# Altium PCB LASERDIODE_FIX.PcbDoc (part 4 of 4)
Units mm, origin at the board's own origin, x right, y up, seen from the top; angles counter-clockwise.
Board outline 85 x 85 mm, 4 copper layers (Top Layer, Mid-Layer 1, Mid-Layer 2, Bottom Layer); 546 components, 363 nets, 1494 pads, 1079 vias.
Unrouted connection lines stored in the file: 1020.
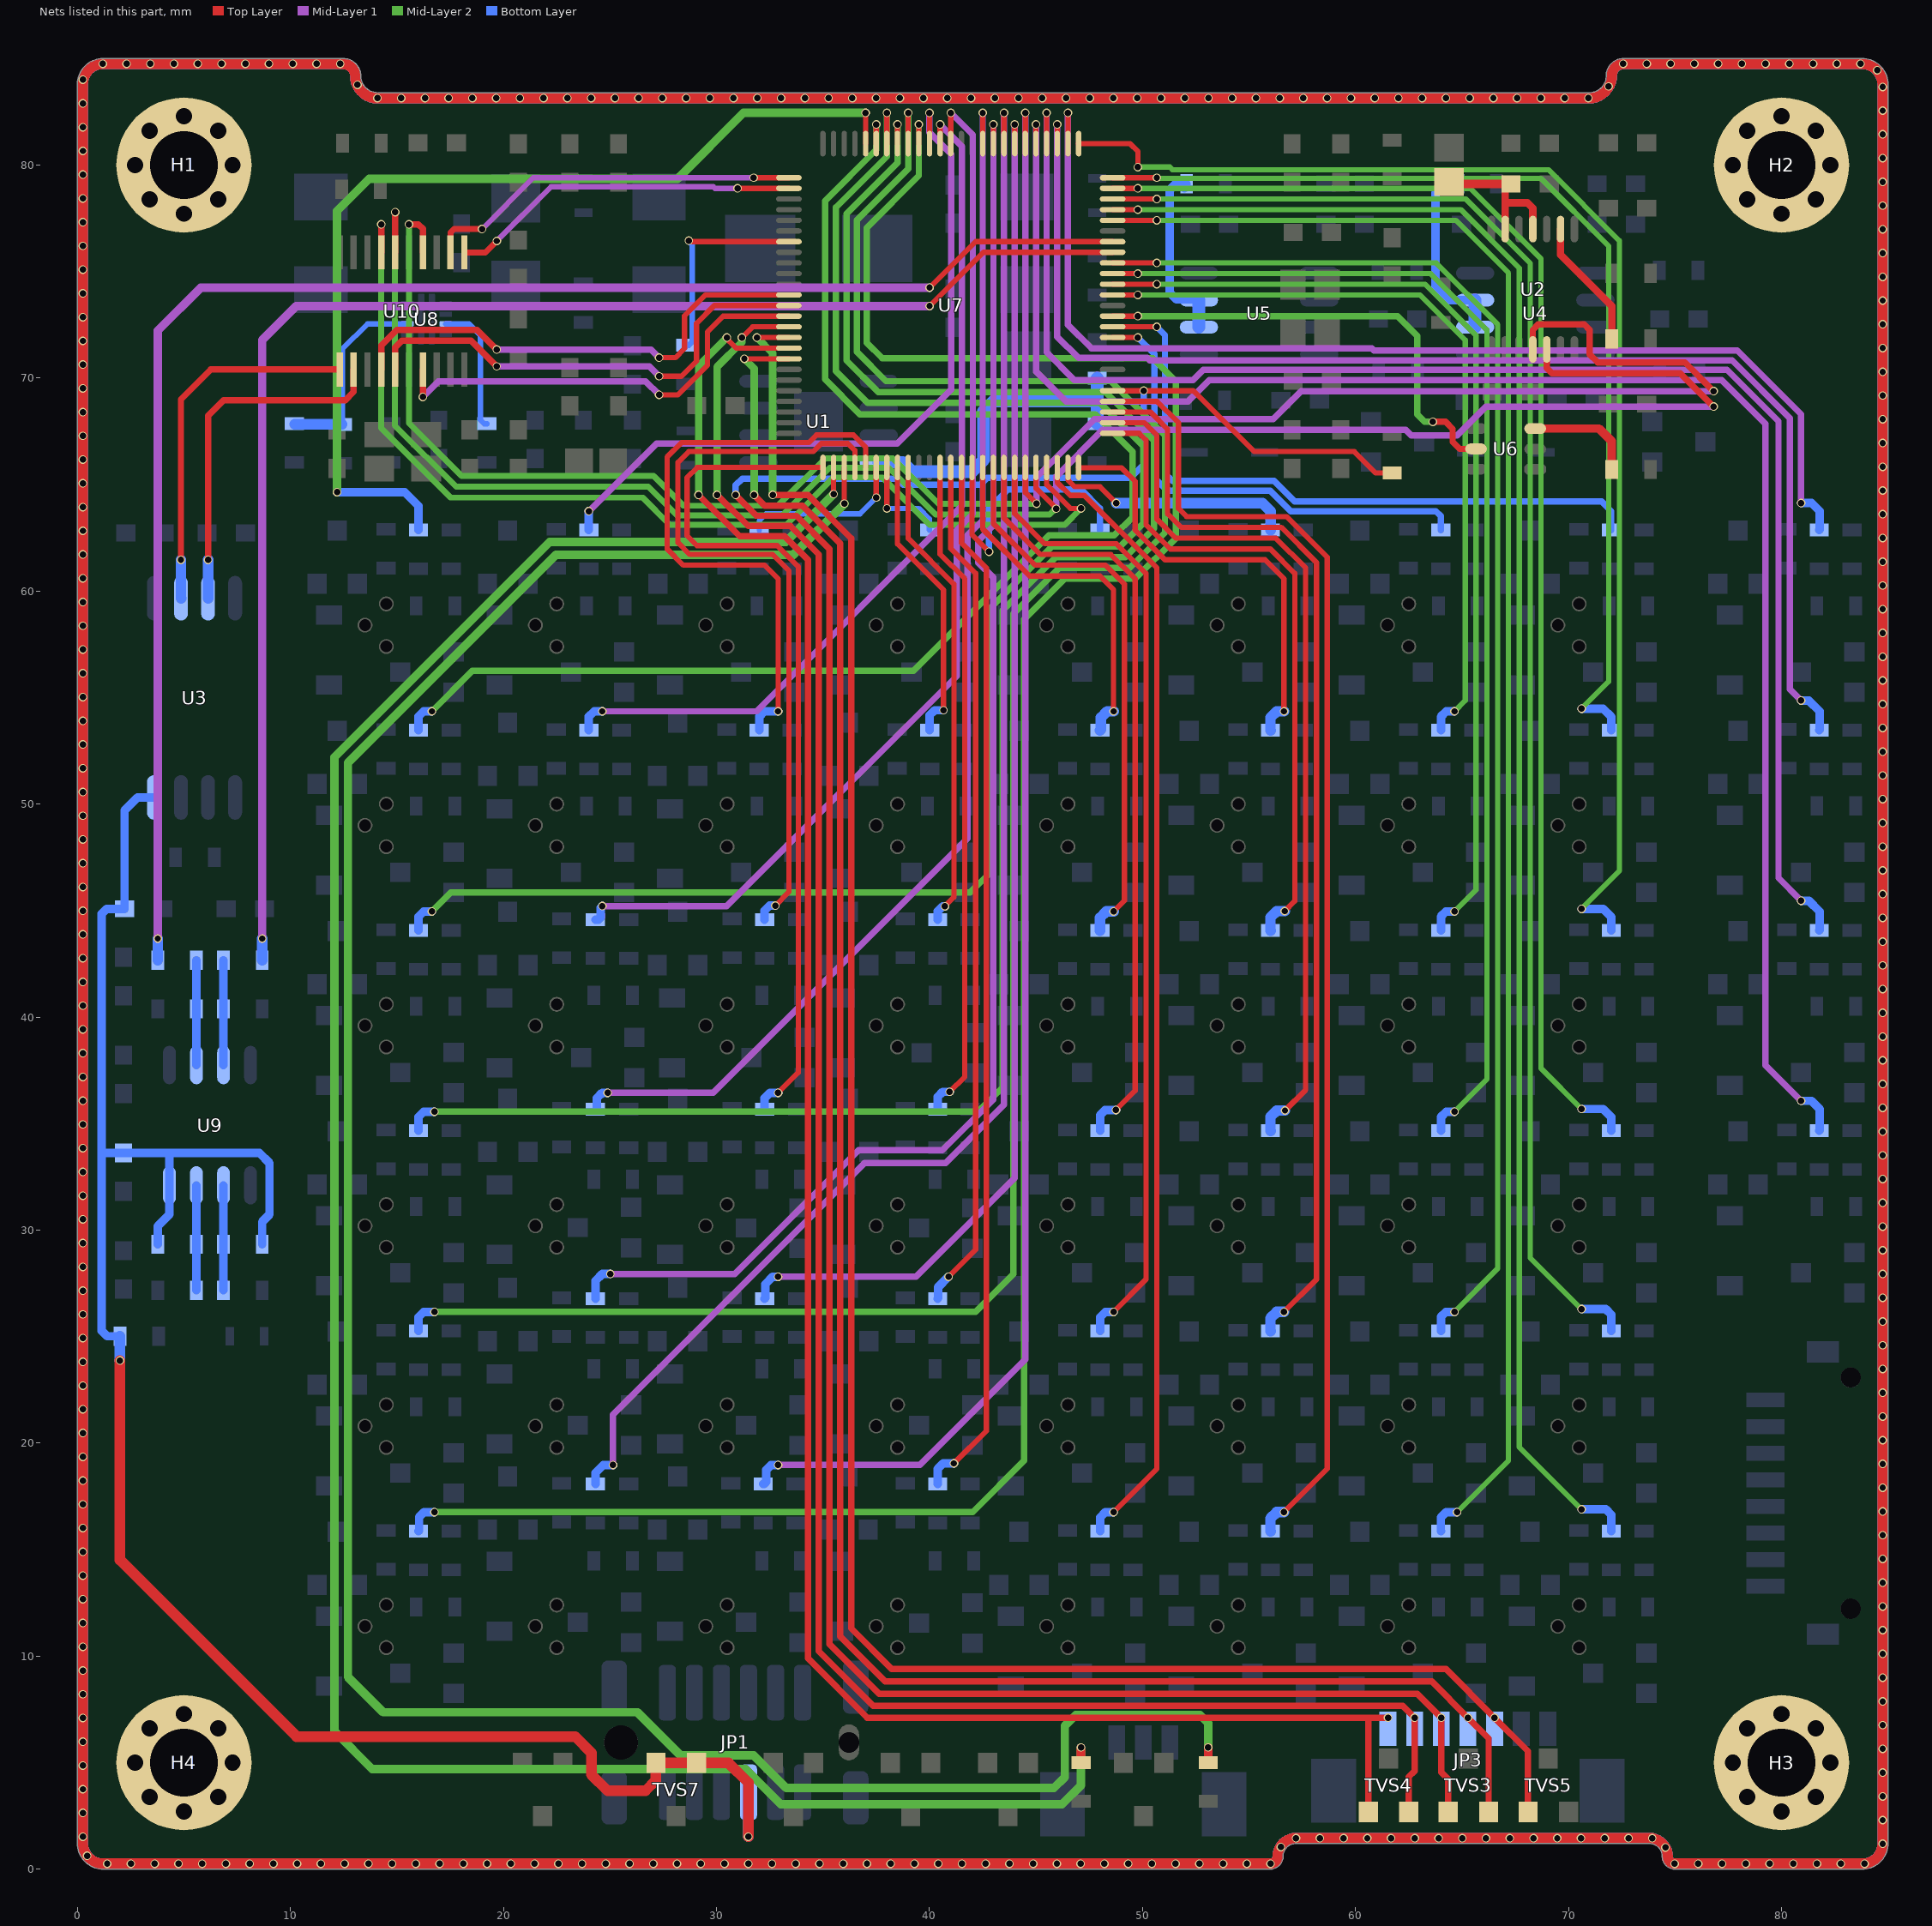
[diagram p6: the nets of this part, all layers, seen from the top]

## Via types
v1: diameter 0.4, hole 0.3, Top Layer to Bottom Layer, tented both sides, 1079 vias

## Nets (pads, with @x,y where several pads share a name; then routed paths per layer and width w, separated by ;. In a path a pad name is that pad's centre, name@x,y a point inside that pad or via, vN(x,y) a via of type N, cw(c..) or ccw(c..) an arc to the next point about the centre after c; other vN are vias at no path point) (continued)
NetR2_1: R2.1 R3.2 U8.2 | length 9.4
  Bottom Layer w0.25: R3.2@10.185,67.856 R3.2@10.204,67.837 ; R2.1@12.426,67.837 R2.1@12.445,67.818 12.445,71.373 13.618,72.546 U8.2@15.487,72.546
  Bottom Layer w0.5: R3.2@10.204,67.837 R2.1@12.426,67.837
NetR4_2: R4.2 U8.9 | length 6.2
  Bottom Layer w0.25: U8.9@17.287,72.546 18.386,72.546 18.923,72.009 18.923,68.031 19.098,67.856 R4.2@19.227,67.856
NetR5_1: R5.1 R7.2 U1.4 | length 15.3
  Bottom Layer w0.6: U1.4@37.623,66.04 38.735,66.04 39.166,65.609 41.987,65.609 42.545,66.167 42.545,68.453 43.016,68.924 47.874,68.924 ; R7.2@47.874,67.856 47.874,68.924 ; R5.1@47.874,69.992 47.874,68.924
NetR185_2: R185.2 U2.9 | length 6.1
  Top Layer w0.35: U2.9@69.626,76.993 69.626,75.789 72.035,73.38 R185.2@72.035,71.844
NetR282_2: R282.2 R287.1 U9.7 | length 4.9
  Bottom Layer w0.4: R287.1@5.588,27.178 R282.2@5.588,29.337 U9.7@5.588,32.1
NetR283_2: R283.2 R289.1 U9.6 | length 4.9
  Bottom Layer w0.4: R289.1@6.858,27.178 R283.2@6.858,29.337 U9.6@6.858,32.1
NetR284_2: R284.2 R290.2 U9.3 | length 4.9
  Bottom Layer w0.4: U9.3@6.858,37.75 R284.2@6.858,40.386 R290.2@6.858,42.672
NetR285_2: R285.2 R286.2 U9.2 | length 4.9
  Bottom Layer w0.4: U9.2@5.588,37.75 R285.2@5.588,40.386 R286.2@5.588,42.672
NetR304_1: R304.1 U5.6 U5.7 | length 8.8
  Bottom Layer w0.4: R304.1@51.97,78.908 51.97,79.021 R304.1@52.07,79.121 51.562,79.121 51.285,78.844 51.285,74.008 51.604,73.688 52.621,73.688 U5.7@52.649,73.66
  Bottom Layer w0.6: U5.6@52.649,72.39 U5.7@52.649,73.66
NetR305_1: R305.1 U4.6 U4.7 | length 9
  Bottom Layer w0.4: R305.1@64.798,79.121 64.742,79.121 64.698,79.076 64.132,79.076 63.754,78.698 63.754,74.295 64.389,73.66 U4.7@65.615,73.66
  Bottom Layer w0.6: U4.6@65.615,72.39 U4.7@65.615,73.66
NetR313_2: R313.2 U7.82 | length 9.9
  Top Layer w0.25: v1(28.702,76.454) 28.743,76.454 28.791,76.406 U7.82@33.4,76.406
  Bottom Layer w0.26: R313.2@28.551,71.539 28.694,71.539 28.864,71.709 28.864,76.254 28.702,76.416 v1(28.702,76.454)
NetR322_2: R322.2 U6.3 | length 5.2
  Top Layer w0.4: U6.3@68.438,67.63 71.435,67.63 72.035,67.03 R322.2@72.035,65.711
NetU3_2: U3.2 U10.1 | length 17.4
  Top Layer w0.3: v1(4.86,61.468) 4.86,68.995 6.267,70.402 U10.1@12.315,70.402
  Bottom Layer w0.5: v1(4.86,61.468) 4.86,59.669 U3.2@4.863,59.666
NetU3_3: U3.3 U10.2 | length 16.9
  Top Layer w0.3: v1(6.133,61.468) 6.133,68.236 6.858,68.961 12.573,68.961 12.965,69.353 U10.2@12.965,70.402
  Bottom Layer w0.5: U3.3@6.133,59.666 v1(6.133,61.468)
RST: JP3.5 R319.2 TVS3.1 U7.30 | length 130
  Top Layer w0.25: U7.30@48.6,69.406 52.387,69.406 55.245,66.548 59.944,66.548 60.946,65.546 R319.2@61.722,65.546
  Top Layer w0.3: v1(30.899,64.516) 31.881,63.534 33.748,63.534 35.306,61.976 35.306,10.561 37.633,8.235 62.905,8.235 v1(64.028,7.112) 64.028,4.552 64.352,4.228 TVS3.1@64.352,2.687
  Bottom Layer w0.3: v1(30.899,64.516) 30.899,64.967 31.21,65.278 38.481,65.278 38.771,64.988 42.382,64.988 42.712,65.318 49.443,65.318 50.06,65.935 v1(50.06,69.404)
RX0BF: U7.76 U10.12 | length 17.9
  Top Layer w0.25: v1(31.75,79.406) U7.76@33.4,79.406
  Top Layer w0.28: U10.12@17.515,75.902 17.525,75.912 17.525,76.832 17.689,76.996 v1(18.991,76.996)
  Mid-Layer 1 w0.25: v1(18.991,76.996) 21.401,79.406 v1(31.75,79.406)
RX1BF: U7.77 U10.11 | length 16.5
  Top Layer w0.25: v1(30.988,78.906) U7.77@33.4,78.906
  Top Layer w0.28: U10.11@18.165,75.902 19.155,75.902 v1(19.689,76.436)
  Mid-Layer 1 w0.25: v1(19.689,76.436) 22.234,78.981 29.858,78.981 29.933,78.906 v1(30.988,78.906)
RXD0: R308.1 U7.2 | length 114.9
  Top Layer w0.25: v1@35.496,64.55 35.5,64.554 U7.2@35.5,65.806
  Top Layer w0.4: R308.1@47.117,5.007 v1(47.117,5.715)
  Mid-Layer 2 w0.4: v1@35.496,64.55 33.253,62.307 22.175,62.307 12.065,52.197 12.065,6.477 13.843,4.699 31.369,4.699 33.02,3.048 46.228,3.048 47.117,3.937 v1(47.117,5.715)
  other v1: 35.5,64.55
SCL: R290.1 U7.43 | length 70.7
  Top Layer w0.25: v1@40.034,73.403 42.536,75.906 U7.43@48.6,75.906
  Mid-Layer 1 w0.4: v1(8.674,43.688) 8.674,71.793 10.263,73.382 v1(40.005,73.382)
  Bottom Layer w0.5: R290.1@8.674,42.672 v1(8.674,43.688)
SDA: R286.1 U7.44 | length 76.1
  Top Layer w0.25: v1(40.005,74.247) 42.164,76.406 U7.44@48.6,76.406
  Mid-Layer 1 w0.4: v1(3.772,43.688) 3.772,72.225 5.794,74.247 v1(40.005,74.247)
  Bottom Layer w0.5: R286.1@3.772,42.672 v1(3.772,43.688)
SHIELD: H1.1 H2.1 H3.1 H4.1 | length 1360.6
  Top Layer w0.5: H1.1@5,80 H1.1@5,82.286 ; 5,84.749 4.997,84.752 ; 4.997,84.752 4.997,84.755 v1(1.192,84.755) ccw(c1.192,83.814) 0.251,83.814 0.251,1.203 ccw(c1.201,1.203) 1.201,0.254 v1(56.014,0.254) ccw(c56.014,0.595) 56.355,0.595 cw(c57.211,0.595) v1(57.211,1.45) 73.794,1.45 cw(c73.794,0.598) 74.647,0.598 74.647,0.584 ccw(c74.979,0.584) v1(74.979,0.252) 83.814,0.252 ccw(c83.814,1.188) v1(84.75,1.188) 84.75,83.794 ccw(c83.792,83.794) 83.792,84.752 v1(72.564,84.752) ccw(c72.564,84.215) 72.026,84.215 cw(c70.955,84.215) 70.955,83.144 v1(14.084,83.144) cw(c14.084,84.177) 13.051,84.177 ccw(c12.476,84.177) 12.476,84.752 4.997,84.752
  Mid-Layer 1 w0.5: 5,84.749 4.997,84.752 ; 4.997,84.752 12.476,84.752 cw(c12.476,84.177) 13.051,84.177 ccw(c14.084,84.177) v1(14.084,83.144) 70.955,83.144 ccw(c70.955,84.215) 72.026,84.215 cw(c72.564,84.215) v1(72.564,84.752) 83.792,84.752 cw(c83.792,83.794) 84.75,83.794 v1(84.75,1.188) cw(c83.814,1.188) 83.814,0.252 v1(74.979,0.252) cw(c74.979,0.584) 74.647,0.584 74.647,0.598 ccw(c73.794,0.598) 73.794,1.45 v1(57.211,1.45) ccw(c57.211,0.595) 56.355,0.595 cw(c56.014,0.595) v1(56.014,0.254) 1.201,0.254 cw(c1.201,1.203) 0.251,1.203 0.251,83.814 cw(c1.192,83.814) v1(1.192,84.755) 4.997,84.755 4.997,84.752
  Mid-Layer 2 w0.5: 5,84.749 4.997,84.752 ; 4.997,84.752 12.476,84.752 cw(c12.476,84.177) 13.051,84.177 ccw(c14.084,84.177) v1(14.084,83.144) 70.955,83.144 ccw(c70.955,84.215) 72.026,84.215 cw(c72.564,84.215) v1(72.564,84.752) 83.792,84.752 cw(c83.792,83.794) 84.75,83.794 v1(84.75,1.188) cw(c83.814,1.188) 83.814,0.252 v1(74.979,0.252) cw(c74.979,0.584) 74.647,0.584 74.647,0.598 ccw(c73.794,0.598) 73.794,1.45 v1(57.211,1.45) ccw(c57.211,0.595) 56.355,0.595 cw(c56.014,0.595) v1(56.014,0.254) 1.201,0.254 cw(c1.201,1.203) 0.251,1.203 0.251,83.814 cw(c1.192,83.814) v1(1.192,84.755) 4.997,84.755 4.997,84.752
  Bottom Layer w0.5: 5,84.749 4.997,84.752 ; 4.997,84.752 4.997,84.755 v1(1.192,84.755) ccw(c1.192,83.814) 0.251,83.814 0.251,1.203 ccw(c1.201,1.203) 1.201,0.254 v1(56.014,0.254) ccw(c56.014,0.595) 56.355,0.595 cw(c57.211,0.595) v1(57.211,1.45) 73.794,1.45 cw(c73.794,0.598) 74.647,0.598 74.647,0.584 ccw(c74.979,0.584) v1(74.979,0.252) 83.814,0.252 ccw(c83.814,1.188) v1(84.75,1.188) 84.75,83.794 ccw(c83.792,83.794) 83.792,84.752 v1(72.564,84.752) ccw(c72.564,84.215) 72.026,84.215 cw(c70.955,84.215) 70.955,83.144 v1(14.084,83.144) cw(c14.084,84.177) 13.051,84.177 ccw(c12.476,84.177) 12.476,84.752 4.997,84.752
  other v1: 1.397,0.254 2.512,0.254 3.626,0.254 4.741,0.254 5.856,0.254 6.97,0.254 8.085,0.254 9.199,0.254 10.314,0.254 11.429,0.254 12.543,0.254 13.658,0.254 14.773,0.254 15.887,0.254 17.002,0.254 18.117,0.254 19.231,0.254 20.346,0.254 21.46,0.254 22.575,0.254 23.69,0.254 24.804,0.254 25.919,0.254 27.034,0.254 28.148,0.254 29.263,0.254 30.378,0.254 31.492,0.254 32.607,0.254 33.721,0.254 34.836,0.254 35.951,0.254 37.065,0.254 38.18,0.254 39.295,0.254 40.409,0.254 41.524,0.254 42.639,0.254 43.753,0.254 44.868,0.254 45.982,0.254 47.097,0.254 48.212,0.254 49.326,0.254 50.441,0.254 51.556,0.254 52.67,0.254 53.785,0.254 54.9,0.254 76.094,0.252 77.208,0.252 78.323,0.252 79.438,0.252 80.552,0.252 81.667,0.252 82.781,0.252 83.896,0.252 0.458,0.628 74.549,1.016 56.491,1.043 58.325,1.45 59.44,1.45 60.555,1.45 61.669,1.45 62.784,1.45 63.898,1.45 65.013,1.45 66.128,1.45 67.242,1.45 68.357,1.45 69.472,1.45 70.586,1.45 71.701,1.45 72.816,1.45 73.93,1.45 0.254,1.524 84.75,2.303 0.254,2.639 84.75,3.418 0.254,3.753 84.75,4.532 0.254,4.868 84.75,5.647 0.254,5.983 84.75,6.762 0.254,7.097 84.75,7.876 0.254,8.212 84.75,8.991 0.254,9.326 84.75,10.105 0.254,10.441 84.75,11.22 0.254,11.556 84.75,12.335 0.254,12.67 84.75,13.449 0.254,13.785 84.75,14.564 0.254,14.9 84.75,15.679 0.254,16.014 84.75,16.793 0.254,17.129 84.75,17.908 0.254,18.244 84.75,19.023 0.254,19.358 84.75,20.137 0.254,20.473 84.75,21.252 0.254,21.587 84.75,22.366 0.254,22.702 84.75,23.481 0.254,23.817 84.75,24.596 0.254,24.931 84.75,25.71 0.254,26.046 84.75,26.825 0.254,27.161 84.75,27.94 0.254,28.275 84.75,29.054 0.254,29.39 84.75,30.169 0.254,30.505 84.75,31.283 0.254,31.619 84.75,32.398 0.254,32.734 84.75,33.513 0.254,33.848 84.75,34.627 0.254,34.963 84.75,35.742 0.254,36.078 84.75,36.857 0.254,37.192 84.75,37.971 0.254,38.307 84.75,39.086 0.254,39.422 84.75,40.201 0.254,40.536 84.75,41.315 0.254,41.651 84.75,42.43 0.254,42.766 84.75,43.544 0.254,43.88 84.75,44.659 0.254,44.995 84.75,45.774 0.254,46.109 84.75,46.888 0.254,47.224 84.75,48.003 0.254,48.339 84.75,49.118 0.254,49.453 84.75,50.232 0.254,50.568 84.75,51.347 0.254,51.683 84.75,52.462 0.254,52.797 84.75,53.576 0.254,53.912 84.75,54.691 0.254,55.027 84.75,55.805 0.254,56.141 84.75,56.92 0.254,57.256 84.75,58.035 0.254,58.37 84.75,59.149 0.254,59.485 84.75,60.264 0.254,60.6 84.75,61.379 0.254,61.714 84.75,62.493 0.254,62.829 84.75,63.608 0.254,63.944 84.75,64.723 0.254,65.058 84.75,65.837 0.254,66.173 84.75,66.952 0.254,67.288 84.75,68.066 0.254,68.402 84.75,69.181 0.254,69.517 84.75,70.296 0.254,70.631 84.75,71.41 0.254,71.746 84.75,72.525 0.254,72.861 84.75,73.64 0.254,73.975 84.75,74.754 0.254,75.09 84.75,75.869 0.254,76.205 84.75,76.984 0.254,77.319 84.75,78.098 0.254,78.434 84.75,79.213 0.254,79.549 84.75,80.327 0.254,80.663 84.75,81.442 0.254,81.778 84.75,82.557 0.254,82.892 15.199,83.144 16.314,83.144 17.428,83.144 18.543,83.144 19.658,83.144 20.772,83.144 21.887,83.144 23.002,83.144 24.116,83.144 25.231,83.144 26.345,83.144 27.46,83.144 28.575,83.144 29.689,83.144 30.804,83.144 31.919,83.144 33.033,83.144 34.148,83.144 35.263,83.144 36.377,83.144 37.492,83.144 38.606,83.144 39.721,83.144 40.836,83.144 41.95,83.144 43.065,83.144 44.18,83.144 45.294,83.144 46.409,83.144 47.524,83.144 48.638,83.144 49.753,83.144 50.867,83.144 51.982,83.144 53.097,83.144 54.211,83.144 55.326,83.144 56.441,83.144 57.555,83.144 58.67,83.144 59.785,83.144 60.899,83.144 62.014,83.144 63.128,83.144 64.243,83.144 65.358,83.144 66.472,83.144 67.587,83.144 68.702,83.144 69.816,83.144 70.931,83.144 84.75,83.671 71.882,83.693 13.151,83.767 0.254,84.007 84.494,84.457 2.307,84.755 3.421,84.755 4.536,84.755 5.65,84.755 6.765,84.755 7.88,84.755 8.994,84.755 10.109,84.755 11.224,84.755 12.338,84.755 73.678,84.752 74.793,84.752 75.908,84.752 77.022,84.752 78.137,84.752 79.251,84.752 80.366,84.752 81.481,84.752 82.595,84.752 83.71,84.752
SPI_MISO: U7.22 U10.17 | length 50.7
  Top Layer w0.25: U7.22@45.5,65.806 45.5,64.99 46.609,63.881 v1(47.117,63.881)
  Top Layer w0.3: U10.17@14.265,75.902 v1(14.265,77.216)
  Mid-Layer 2 w0.28: v1(14.265,77.216) 14.265,67.65 17.526,64.389 26.543,64.389 27.813,63.119 33.286,63.119 35.503,65.336 37.788,65.336 40.005,63.119 46.355,63.119 v1(47.117,63.881)
SPI_MOSI: U2.5 U7.21 U10.16 | length 92.4
  Top Layer w0.25: U7.21@45,65.806 45,64.831 45.947,63.884 v1(45.947,63.866)
  Top Layer w0.3: U10.16@14.915,75.902 v1(14.915,77.793) ; U2.5@68.976,71.343 68.976,70.47 69.215,70.231 75.243,70.231 v1(76.815,68.66)
  Mid-Layer 1 w0.3: v1(45.947,63.866) 45.947,65.379 48.131,67.564 62.357,67.564 62.611,67.31 64.77,67.31 66.12,68.66 v1(76.815,68.66)
  Mid-Layer 2 w0.28: v1@14.91,77.793 14.91,67.767 17.78,64.897 26.797,64.897 28.143,63.551 33.076,63.551 35.311,65.786 38.096,65.786 40.294,63.587 45.641,63.587 45.92,63.866 v1(45.947,63.866)
SPI_SCK: U2.4 U7.20 U10.14 | length 92.2
  Top Layer w0.25: U7.20@44.5,65.806 44.5,64.626 v1(45.025,64.101)
  Top Layer w0.3: v1(15.565,77.216) 16.002,77.216 16.215,77.003 U10.14@16.215,75.902 ; U2.4@68.326,71.343 68.326,72.263 68.58,72.517 70.739,72.517 70.993,72.263 70.993,71.12 71.374,70.739 75.462,70.739 v1(76.815,69.387)
  Mid-Layer 1 w0.3: v1(45.025,64.101) 45.025,65.345 47.752,68.072 56.134,68.072 57.449,69.387 v1(76.815,69.387)
  Mid-Layer 2 w0.28: v1(15.565,77.216) 15.565,67.874 18.034,65.405 27.051,65.405 28.448,64.008 32.887,64.008 35.116,66.238 38.283,66.238 40.42,64.101 v1(45.025,64.101)
SW0: R36.1 U7.36 | length 31.7
  Top Layer w0.25: U7.36@48.6,72.406 v1(50.673,72.406)
  Bottom Layer w0.3: v1(50.673,72.406) 51.054,72.025 51.054,65.525 51.404,65.175 56.179,65.175 57.144,64.21 71.553,64.21 72.009,63.754 R36.1@72.009,62.864
SW1: R37.1 U7.35 | length 22.9
  Top Layer w0.25: U7.35@48.6,71.906 v1(49.784,71.906)
  Bottom Layer w0.3: v1@49.803,71.887 50.56,71.13 50.56,65.313 51.163,64.709 56.001,64.709 56.956,63.754 63.775,63.754 64.009,63.52 R37.1@64.009,62.864
SW2: R38.1 U7.24 | length 11.6
  Top Layer w0.25: U7.24@46.5,65.806 46.5,65.214 46.817,64.898 48.005,64.898 v1(48.768,64.135)
  Bottom Layer w0.5: v1(48.768,64.135) 55.626,64.135 56.009,63.752 R38.1@56.009,62.864
SW3: R39.1 U7.15 | length 13.3
  Top Layer w0.25: U7.15@42,65.806 42,62.648 v1(42.799,61.849)
  Bottom Layer w0.3: v1(42.799,61.849) 42.799,63.881 43.688,64.77 47.117,64.77 48.009,63.878 R39.1@48.009,62.864
SW4: R40.1 U7.7 | length 4.7
  Top Layer w0.25: v1(38,63.881) U7.7@38,65.806
  Bottom Layer w0.25: v1(38,63.881) 39.502,63.881 39.991,63.392 39.991,62.882 R40.1@40.009,62.864
SW5: R41.1 U7.6 | length 7.8
  Top Layer w0.25: v1(37.5,64.389) U7.6@37.5,65.806
  Bottom Layer w0.25: R41.1@32.009,62.864 32.009,63.313 32.324,63.627 36.738,63.627 v1(37.5,64.389)
SW6: R42.1 U7.65 | length 35.1
  Top Layer w0.25: U7.65@40,81.006 v1(40,82.454)
  Mid-Layer 1 w0.3: v1(24.009,63.754) 27.184,66.929 38.481,66.929 41.021,69.469 41.021,73.279 41.021,73.533 41.021,80.518 40,81.539 v1(40,82.454)
  Bottom Layer w0.4: R42.1@24.009,62.864 v1(24.009,63.754)
SW7: R43.1 U7.71 | length 46.6
  Top Layer w0.25: U7.71@37,81.006 v1(37,82.454)
  Mid-Layer 2 w0.4: v1(12.192,64.643) 12.192,77.851 13.699,79.358 28.177,79.358 31.273,82.454 v1(37,82.454)
  Bottom Layer w0.4: v1(12.192,64.643) 15.367,64.643 16.009,64.001 R43.1@16.009,62.864
SW8: R44.1 U7.50 | length 49
  Top Layer w0.25: U7.50@48.6,79.406 v1(50.673,79.406)
  Mid-Layer 2 w0.25: v1@50.673,79.375 68.707,79.375 71.882,76.2 71.882,55.753 v1(70.612,54.483)
  Bottom Layer w0.4: v1(70.612,54.483) 71.628,54.483 72.009,54.102 R44.1@72.009,53.464
SW9: R71.1 U7.39 | length 36.4
  Top Layer w0.25: U7.39@48.6,73.906 v1(49.784,73.906)
  Mid-Layer 2 w0.25: v1(49.784,73.906) 63.028,73.906 65.151,71.783 65.151,54.864 v1(64.643,54.356)
  Bottom Layer w0.4: R71.1@64.009,53.464 64.009,54.103 64.262,54.356 v1(64.643,54.356)
SW10: R70.1 U7.25 | length 20.7
  Top Layer w0.25: U7.25@47,65.806 47,65.786 49.022,65.786 49.657,65.151 49.657,62.865 51.054,61.468 55.753,61.468 56.642,60.579 v1(56.642,54.356)
  Bottom Layer w0.5: R70.1@56.009,53.464 56.007,53.466 56.007,54.063 56.3,54.356 v1(56.642,54.356)
SW11: R69.1 U7.16 | length 17.3
  Top Layer w0.25: U7.16@42.5,65.806 42.5,62.91 44.704,60.706 48.006,60.706 48.641,60.071 v1(48.641,54.356)
  Bottom Layer w0.5: R69.1@48.009,53.464 48.053,53.507 48.053,54.063 48.346,54.356 v1(48.641,54.356)
SW12: R68.1 U7.8 | length 13.7
  Top Layer w0.25: U7.8@38.5,65.806 38.5,62.211 40.658,60.053 v1(40.658,54.405)
  Bottom Layer w0.4: R68.1@40.009,53.464 40.009,54.171 40.243,54.405 v1(40.658,54.405)
SW13: R67.1 U7.5 | length 28.9
  Top Layer w0.25: v1(32.893,54.356) 32.893,60.579 32.258,61.214 28.448,61.214 27.686,61.976 27.686,66.294 28.367,66.975 34.336,66.975 34.692,67.331 36.428,67.331 37,66.759 U7.5@37,65.806
  Bottom Layer w0.4: R67.1@32.009,53.464 32.009,54.107 32.258,54.356 v1(32.893,54.356)
SW14: R66.1 U7.64 | length 41.5
  Top Layer w0.25: U7.64@40.5,81.006 v1(40.5,81.904)
  Mid-Layer 1 w0.3: v1(24.638,54.356) 31.877,54.356 41.529,64.008 41.529,80.875 v1(40.5,81.904)
  Bottom Layer w0.4: R66.1@24.009,53.464 24.009,54.108 24.257,54.356 v1(24.638,54.356)
SW15: R65.1 U7.70 | length 70.8
  Top Layer w0.25: U7.70@37.5,81.006 v1(37.5,81.904)
  Mid-Layer 2 w0.3: v1(16.637,54.356) 18.542,56.261 39.253,56.261 45.603,62.611 48.673,62.611 49.53,63.468 49.53,66.548 47.78,68.298 40.822,68.298 36.739,68.298 35.098,69.94 35.098,78.32 37.5,80.723 v1(37.5,81.904)
  Bottom Layer w0.4: R65.1@16.009,53.464 16.009,54.109 16.256,54.356 v1(16.637,54.356)
SW16: R64.1 U7.51 | length 62
  Top Layer w0.25: U7.51@47,81.006 49.423,81.006 49.784,80.645 v1(49.784,79.906)
  Mid-Layer 2 w0.25: v1(49.784,79.906) 51.285,79.906 51.41,79.781 69.063,79.781 72.39,76.454 72.39,46.863 v1(70.612,45.085)
  Bottom Layer w0.4: v1(70.612,45.085) 71.628,45.085 72.009,44.704 R64.1@72.009,44.064
SW17: R63.1 U7.40 | length 46.9
  Top Layer w0.25: U7.40@48.6,74.406 v1(50.673,74.406)
  Mid-Layer 2 w0.25: v1(50.673,74.406) 63.262,74.406 65.659,72.009 65.659,45.974 v1(64.643,44.958)
  Bottom Layer w0.4: R63.1@64.009,44.064 64.009,44.724 64.243,44.958 v1(64.643,44.958)
SW18: R90.1 U7.26 | length 31.1
  Top Layer w0.25: U7.26@48.6,67.406 49.845,67.406 50.165,67.086 50.165,63.119 51.308,61.976 56.007,61.976 57.15,60.833 57.15,45.451 v1(56.675,44.976)
  Bottom Layer w0.5: R90.1@56.009,44.064 56.007,44.066 56.007,44.683 56.3,44.976 v1(56.675,44.976)
SW19: R91.1 U7.17 | length 26.9
  Top Layer w0.25: U7.17@43,65.806 43,63.172 44.958,61.214 48.26,61.214 49.149,60.325 49.149,45.466 v1(48.641,44.958)
  Bottom Layer w0.5: R91.1@48.009,44.064 48.006,44.067 48.006,44.665 48.299,44.958 v1(48.641,44.958)
SW20: R92.1 U7.9 | length 22.5
  Top Layer w0.25: U7.9@39,65.806 39,62.473 41.148,60.325 41.148,45.627 v1(40.724,45.203)
  Bottom Layer w0.4: R92.1@40.385,44.572 40.386,44.969 40.62,45.203 v1(40.724,45.203)
SW21: R93.1 U7.4 | length 36.1
  Top Layer w0.25: v1(32.76,45.236) 33.401,45.878 33.401,60.96 32.639,61.722 28.751,61.722 28.194,62.279 28.194,66.04 28.702,66.548 34.544,66.548 34.925,66.929 36.171,66.929 36.5,66.6 U7.4@36.5,65.806
  Bottom Layer w0.4: R93.1@32.263,44.572 32.258,44.577 32.258,45.002 32.492,45.236 v1(32.76,45.236)
SW22: R94.1 U7.63 | length 50.6
  Top Layer w0.25: U7.63@41,81.006 v1(41,82.454)
  Mid-Layer 1 w0.3: v1(24.638,45.212) 30.48,45.212 41.275,56.007 41.275,62.55 41.275,62.865 42.037,63.627 42.037,81.417 v1(41,82.454)
  Bottom Layer w0.4: R94.1@24.318,44.572 24.468,44.572 24.568,44.672 24.568,45.142 v1(24.638,45.212)
SW23: R95.1 U7.69 | length 83.7
  Top Layer w0.25: U7.69@38,81.006 v1(38,82.454)
  Mid-Layer 2 w0.3: v1(16.637,44.958) 17.526,45.847 41.91,45.847 42.926,46.863 42.926,59.285 45.745,62.103 48.955,62.103 50.038,63.186 50.038,66.802 48.006,68.834 47.498,68.834 37.096,68.834 35.605,70.325 35.605,78.009 38,80.404 v1(38,82.454)
  Bottom Layer w0.4: R95.1@16.009,44.064 16.009,44.711 16.256,44.958 v1(16.637,44.958)
SW24: R96.1 U7.49 | length 64.4
  Top Layer w0.25: U7.49@48.6,78.906 v1(49.784,78.906)
  Mid-Layer 2 w0.25: v1(49.784,78.906) 65.405,78.906 68.707,75.604 68.707,37.592 v1(70.612,35.687)
  Bottom Layer w0.4: v1(70.612,35.687) 71.628,35.687 72.009,35.306 R96.1@72.009,34.664
SW25: R97.1 U7.41 | length 57.4
  Top Layer w0.25: U7.41@48.6,74.906 v1(49.784,74.906)
  Mid-Layer 2 w0.25: v1(49.784,74.906) 63.524,74.906 66.167,72.263 66.167,37.084 v1(64.643,35.56)
  Bottom Layer w0.4: R97.1@64.009,34.664 64.009,35.307 64.262,35.56 v1(64.643,35.56)
SW26: R98.1 U7.27 | length 41.5
  Top Layer w0.25: U7.27@48.6,67.906 50.077,67.906 50.673,67.31 50.673,63.373 51.562,62.484 56.261,62.484 57.658,61.087 57.658,36.583 v1(56.691,35.616)
  Bottom Layer w0.5: R98.1@56.009,34.664 56.007,34.666 56.007,35.323 56.3,35.616 v1(56.691,35.616)
SW27: R116.1 U7.18 | length 36.6
  Top Layer w0.25: U7.18@43.5,65.806 43.5,63.434 45.212,61.722 48.514,61.722 49.657,60.579 49.657,36.544 v1(48.753,35.64)
  Bottom Layer w0.4: R116.1@48.009,34.664 48.009,35.405 48.243,35.64 v1(48.753,35.64)
SW28: R115.1 U7.12 | length 31.3
  Top Layer w0.25: U7.12@40.5,65.806 40.5,61.735 41.656,60.579 41.656,37.199 v1(40.948,36.491)
  Bottom Layer w0.4: R115.1@40.385,35.68 40.386,36.257 40.62,36.491 v1(40.948,36.491)
SW29: R114.1 U7.1 | length 41.5
  Top Layer w0.25: v1(32.893,36.449) 33.84,37.396 33.84,61.156 32.856,62.14 29.081,62.14 28.623,62.598 28.623,65.327 29.102,65.806 U7.1@35,65.806
  Bottom Layer w0.4: R114.1@32.263,35.68 32.263,36.2 32.512,36.449 v1(32.893,36.449)
SW30: R113.1 U7.60 | length 58.8
  Top Layer w0.25: U7.60@42.5,81.006 v1(42.5,82.454)
  Mid-Layer 1 w0.3: v1(24.892,36.449) 29.845,36.449 41.783,48.387 41.783,62.611 42.5,63.328 v1(42.5,82.454)
  Bottom Layer w0.4: R113.1@24.371,35.669 24.384,35.682 24.384,36.195 24.638,36.449 v1(24.892,36.449)
SW31: R112.1 U7.68 | length 92.8
  Top Layer w0.25: U7.68@38.5,81.006 v1(38.5,81.904)
  Mid-Layer 2 w0.3: v1(16.764,35.56) 42.291,35.56 43.434,36.703 43.434,59.1 45.929,61.595 49.193,61.595 50.546,62.948 50.546,67.056 48.26,69.342 37.592,69.342 36.112,70.822 36.112,77.717 38.5,80.106 v1(38.5,81.904)
  Bottom Layer w0.4: R112.1@16.009,34.664 16.009,35.313 16.256,35.56 v1(16.764,35.56)
SW32: R165.1 U7.48 | length 73.2
  Top Layer w0.25: U7.48@48.6,78.406 v1(50.673,78.406)
  Mid-Layer 2 w0.25: v1(50.673,78.406) 65.185,78.406 68.199,75.392 68.199,28.702 v1(70.612,26.289)
  Bottom Layer w0.4: v1(70.612,26.289) 71.755,26.289 72.009,26.035 R165.1@72.009,25.264
SW33: R166.1 U7.42 | length 67.9
  Top Layer w0.25: U7.42@48.6,75.406 v1(50.673,75.406)
  Mid-Layer 2 w0.25: v1(50.673,75.406) 63.786,75.406 66.675,72.517 66.675,28.194 v1(64.643,26.162)
  Bottom Layer w0.4: R166.1@64.009,25.264 64.009,25.928 64.243,26.162 v1(64.643,26.162)
SW34: R167.1 U7.28 | length 52
  Top Layer w0.25: U7.28@48.6,68.406 50.372,68.406 51.181,67.597 51.181,63.627 51.816,62.992 56.515,62.992 58.166,61.341 58.166,27.686 v1(56.642,26.162)
  Bottom Layer w0.5: R167.1@56.009,25.264 56.007,25.266 56.007,25.869 56.3,26.162 v1(56.642,26.162)
SW35: R168.1 U7.19 | length 46.2
  Top Layer w0.25: U7.19@44,65.806 44,63.638 45.414,62.224 48.774,62.224 50.165,60.833 50.165,27.686 v1(48.641,26.162)
  Bottom Layer w0.4: R168.1@48.009,25.264 48.009,25.911 48.26,26.162 v1(48.641,26.162)
SW36: R169.1 U7.13 | length 40.2
  Top Layer w0.25: v1(40.894,27.813) 42.164,29.083 42.164,60.833 41,61.997 U7.13@41,65.806
  Bottom Layer w0.4: R169.1@40.385,26.788 40.415,26.817 40.415,27.334 v1(40.894,27.813)
SW37: R170.1 U7.57 | length 64.8
  Top Layer w0.25: U7.57@44,81.006 v1(44,81.904)
  Mid-Layer 1 w0.3: v1(32.893,27.813) 39.37,27.813 44,32.443 v1(44,81.904)
  Bottom Layer w0.4: R170.1@32.263,26.788 32.289,26.813 32.289,27.463 32.638,27.813 v1(32.893,27.813)
SW38: R171.1 U7.59 | length 70.2
  Top Layer w0.25: U7.59@43,81.006 v1(43,81.904)
  Mid-Layer 1 w0.3: v1(25.019,27.94) 30.861,27.94 36.67,33.749 40.607,33.749 42.986,36.128 42.986,60.644 42.294,61.336 42.294,62.36 43.004,63.07 v1@43.004,81.796
  Bottom Layer w0.4: R171.1@24.318,26.788 24.318,27.62 24.638,27.94 v1(25.019,27.94)
SW39: R172.1 U7.67 | length 103.4
  Top Layer w0.25: U7.67@39,81.006 v1(39,82.454)
  Mid-Layer 2 w0.3: v1(16.764,26.162) 42.164,26.162 43.942,27.94 43.942,58.928 46.101,61.087 49.403,61.087 51.054,62.738 51.054,67.31 48.51,69.854 41.673,69.854 37.969,69.854 36.59,71.233 36.59,77.418 39,79.828 v1(39,82.454)
  Bottom Layer w0.4: R172.1@16.009,25.264 16.009,25.915 16.256,26.162 v1(16.764,26.162)
SW40: R173.1 U7.47 | length 82
  Top Layer w0.25: U7.47@48.6,77.906 v1(49.784,77.906)
  Mid-Layer 2 w0.25: v1(49.784,77.906) 64.946,77.906 67.691,75.161 67.691,19.812 v1(70.612,16.891)
  Bottom Layer w0.4: v1(70.612,16.891) 71.755,16.891 72.009,16.637 R173.1@72.009,15.864
SW41: R201.1 U7.46 | length 80.3
  Top Layer w0.25: U7.46@48.6,77.406 v1(50.673,77.406)
  Mid-Layer 2 w0.25: v1(50.673,77.406) 64.707,77.406 67.183,74.93 67.183,19.177 v1(64.77,16.764)
  Bottom Layer w0.4: R201.1@64.009,15.864 R201.1@64.009,15.864 64.008,16.51 64.262,16.764 v1(64.77,16.764)
SW42: R202.1 U7.29 | length 62.5
  Top Layer w0.25: U7.29@48.6,68.906 50.686,68.906 51.689,67.903 51.689,63.881 52.07,63.5 56.769,63.5 58.674,61.595 58.674,18.796 v1(56.642,16.764)
  Bottom Layer w0.5: R202.1@56.009,15.864 56.007,15.866 56.007,16.471 56.3,16.764 v1(56.642,16.764)
SW43: R203.1 U7.23 | length 53.6
  Top Layer w0.25: U7.23@46,65.806 46,65.105 46.613,64.491 47.27,64.491 50.673,61.088 50.673,18.796 v1(48.641,16.764)
  Bottom Layer w0.4: R203.1@48.009,15.864 48.009,16.513 48.26,16.764 v1(48.641,16.764)
SW44: R204.1 U7.14 | length 49.5
  Top Layer w0.25: v1(41.148,19.05) 42.672,20.574 42.672,61.087 41.5,62.259 U7.14@41.5,65.806
  Bottom Layer w0.4: R204.1@40.385,18.076 40.386,18.796 40.64,19.05 v1(41.148,19.05)
SW45: R205.1 U7.56 | length 75
  Top Layer w0.25: U7.56@44.5,81.006 v1(44.5,82.454)
  Mid-Layer 1 w0.3: v1(32.893,18.976) 39.55,18.976 44.5,23.926 v1(44.5,82.454)
  Bottom Layer w0.4: R205.1@32.195,18.076 32.229,18.076 32.329,18.176 32.329,18.74 32.565,18.976 v1(32.893,18.976)
SW46: R206.1 U7.58 | length 76.2
  Top Layer w0.25: U7.58@43.5,81.006 v1(43.5,82.454)
  Mid-Layer 1 w0.3: v1(25.141,18.976) 25.141,21.331 36.957,33.147 40.767,33.147 43.5,35.88 v1@43.5,82.423
  Bottom Layer w0.4: R206.1@24.318,18.076 24.328,18.087 24.328,18.613 24.691,18.976 v1(25.141,18.976)
SW47: R207.1 U7.66 | length 113.2
  Top Layer w0.25: U7.66@39.5,81.006 v1(39.5,81.904)
  Mid-Layer 2 w0.3: v1(16.764,16.764) 42.037,16.764 44.45,19.177 44.45,58.674 46.355,60.579 49.657,60.579 51.562,62.484 51.562,67.564 51.562,69.85 50.489,70.923 37.789,70.923 37.053,71.659 37.053,77.058 39.5,79.505 v1(39.5,81.904)
  Bottom Layer w0.4: R207.1@16.009,15.864 16.041,15.895 16.041,16.53 16.275,16.764 v1(16.764,16.764)
SW_EXT_0: R279.1 U7.52 | length 53.7
  Top Layer w0.25: U7.52@46.5,81.006 v1(46.5,82.454)
  Mid-Layer 1 w0.3: v1(46.5,82.454) 46.5,72.499 47.596,71.403 60.76,71.403 60.865,71.299 77.926,71.299 80.92,68.305 v1(80.92,64.135)
  Bottom Layer w0.4: v1(80.92,64.135) 81.407,64.135 81.788,63.754 81.788,62.882 R279.1@81.769,62.864
SW_EXT_1: R277.1 U7.53 | length 62.3
  Top Layer w0.25: U7.53@46,81.006 v1(46,81.904)
  Mid-Layer 1 w0.3: v1(46,81.904) 46,71.946 46.993,70.953 50.228,70.953 50.342,70.839 51.435,70.839 77.668,70.839 80.391,68.116 80.391,55.393 v1(80.92,54.864)
  Bottom Layer w0.4: v1(80.92,54.864) 81.28,54.864 81.788,54.356 81.788,53.484 R277.1@81.769,53.465
SW_EXT_2: R278.1 U7.54 | length 73.7
  Top Layer w0.25: U7.54@45.5,81.006 v1(45.5,82.454)
  Mid-Layer 1 w0.3: v1(45.5,82.454) 45.5,71.681 45.5,71.213 46.806,69.907 52.381,69.907 52.86,70.386 77.442,70.386 79.858,67.97 79.858,46.528 v1(80.92,45.466)
  Bottom Layer w0.4: v1(80.92,45.466) 81.28,45.466 81.788,44.958 81.788,44.082 R278.1@81.769,44.064
SW_EXT_3: R276.1 U7.55 | length 83.1
  Top Layer w0.25: U7.55@45,81.006 v1(45,81.904)
  Mid-Layer 1 w0.3: v1(45,81.904) 45,70.316 46.413,68.903 52.139,68.903 53.146,69.91 77.19,69.91 79.248,67.851 79.248,37.74 v1(80.92,36.068)
  Bottom Layer w0.4: v1(80.92,36.068) 81.407,36.068 81.788,35.687 81.788,34.682 R276.1@81.769,34.664
TCK: JP3.4 TVS3.3 U7.93 | length 100.8
  Top Layer w0.25: v1(31.309,70.906) U7.93@33.4,70.906
  Top Layer w0.3: v1(31.769,64.516) 32.273,64.012 34.032,64.012 35.814,62.23 35.814,10.922 37.924,8.812 63.578,8.812 v1(65.278,7.112) 66.252,6.138 TVS3.3@66.252,2.687
  Mid-Layer 2 w0.35: v1(31.309,70.906) 31.769,70.446 v1(31.769,64.516)
TDI: JP3.6 TVS4.3 U7.90 | length 101.5
  Top Layer w0.25: v1(31.194,71.906) 31.694,72.406 U7.90@33.4,72.406
  Top Layer w0.3: v1(30.029,64.516) 31.492,63.053 33.467,63.053 34.798,61.722 34.798,10.233 37.356,7.675 62.215,7.675 v1(62.778,7.112) 62.778,4.612 62.502,4.336 TVS4.3@62.502,2.687
  Mid-Layer 2 w0.35: v1(30.029,64.516) 30.029,70.533 31.185,71.688 31.185,71.896 v1(31.194,71.906)
TDO: JP3.3 TVS5.1 U7.91 | length 101.9
  Top Layer w0.25: v1(31.899,71.906) U7.91@33.4,71.906
  Top Layer w0.3: v1(32.639,64.516) 34.29,64.516 36.322,62.484 36.322,11.303 38.227,9.398 64.242,9.398 v1(66.528,7.112) 68.102,5.538 TVS5.1@68.102,2.687
  Mid-Layer 2 w0.35: v1(31.899,71.906) 32.639,71.166 v1(32.639,64.516)
TMS: JP3.7 TVS4.1 U7.92 | length 101.9
  Top Layer w0.25: v1@30.489,71.899 30.489,71.858 30.588,71.76 30.588,71.74 30.922,71.406 U7.92@33.4,71.406
  Top Layer w0.3: v1@29.159,64.5 31.088,62.571 33.187,62.571 34.29,61.468 34.29,9.906 37.084,7.112 60.602,7.112 ; TVS4.1@60.602,2.687 60.602,7.112 ; v1(61.528,7.112) 60.602,7.112
  Mid-Layer 2 w0.35: v1@29.159,64.5 29.159,70.576 v1(30.489,71.906)
  other v1: 29.159,64.516
TX0RTS: U7.87 U10.4 | length 23.2
  Top Layer w0.25: v1(27.305,70.96) 28.07,70.96 28.501,71.391 28.501,72.921 29.486,73.906 U7.87@33.4,73.906
  Top Layer w0.3: U10.4@14.265,70.402 14.265,71.542 14.986,72.263 18.764,72.263 v1(19.685,71.342)
  Mid-Layer 1 w0.3: v1(19.685,71.342) 26.923,71.342 v1(27.305,70.96)
TX1RTS: U7.88 U10.5 | length 22.8
  Top Layer w0.25: v1(27.305,70.088) 28.355,70.088 29.064,70.796 29.064,72.57 29.9,73.406 U7.88@33.4,73.406
  Top Layer w0.3: U10.5@14.915,70.402 14.915,71.43 15.24,71.755 18.479,71.755 v1(19.685,70.549)
  Mid-Layer 1 w0.3: v1(19.685,70.549) 26.844,70.549 v1(27.305,70.088)
TX2RTS: U7.89 U10.7 | length 21.5
  Top Layer w0.25: v1(27.305,69.215) 28.194,69.215 29.581,70.602 29.581,72.172 30.316,72.906 U7.89@33.4,72.906
  Top Layer w0.3: v1(16.215,69.112) U10.7@16.215,70.402
  Mid-Layer 1 w0.3: v1(16.215,69.112) 16.953,69.85 26.67,69.85 v1(27.305,69.215)
TXD0: R303.1 U7.3 | length 120.4
  Top Layer w0.25: U7.3@36,65.806 36,64.121 v1@36.013,64.108
  Top Layer w0.4: R303.1@53.086,5.007 v1(53.086,5.715)
  Mid-Layer 2 w0.4: v1@36.013,64.108 33.615,61.71 22.467,61.71 12.7,51.943 12.7,9.017 14.351,7.366 26.289,7.366 28.321,5.334 31.75,5.334 33.274,3.81 45.847,3.81 46.355,4.318 46.355,6.731 46.863,7.239 52.705,7.239 53.086,6.858 v1(53.086,5.715)
  other v1: 36,64.108
VBUS: C23.1 C40.1 JP1.10 R187.2 R282.1 R283.1 TVS7.1 TVS7.3 U3.8 U9.8 | length 95.5
  Top Layer w0.5: v1(1.993,23.876) 1.993,14.517 10.287,6.223 23.368,6.223 24.13,5.461 24.13,4.445 24.892,3.683 26.67,3.683 27.159,4.172 TVS7.3@27.159,4.989 TVS7.1@29.059,4.989 30.571,4.989 31.496,4.064 v1(31.496,1.524)
  Bottom Layer w0.4: 1.27,33.623 C40.1@2.159,33.623 4.318,33.623 ; R187.2@1.993,25.014 1.988,25.019 1.397,25.019 1.143,25.273 1.143,44.851 1.377,45.085 C23.1@2.211,45.085 2.211,49.709 2.818,50.316 U3.8@3.593,50.316 ; R282.1@3.772,29.337 3.772,30.188 4.318,30.734 U9.8@4.318,32.1 4.318,33.623 ; R283.1@8.674,29.337 8.674,30.391 9.017,30.734 9.017,33.147 8.541,33.623 4.318,33.623
  Bottom Layer w0.5: v1(1.993,23.876) R187.2@1.993,25.014 ; v1(31.496,1.524) 31.496,3.606 JP1.10@31.503,3.613
VREF_DAC: C19.2 L3.1 U2.11 U2.13 | length 7.6
  Top Layer w0.35: U2.13@67.026,76.993 67.026,78.232 ; C19.2@67.299,79.121 67.251,79.121 67.026,78.896 67.026,78.232 ; U2.11@68.326,76.993 68.326,77.978 68.072,78.232 67.026,78.232
  Top Layer w0.4: L3.1@64.389,79.21 64.478,79.121 C19.2@67.251,79.121
WAKE: U6.5 U7.37 | length 22.1
  Top Layer w0.25: U7.37@48.6,72.906 v1(49.784,72.906)
  Top Layer w0.3: v1(63.627,67.945) 64.225,67.945 64.562,67.608 64.562,67.01 64.897,66.675 U6.5@65.659,66.675
  Mid-Layer 2 w0.3: v1(49.784,72.906) 61.968,72.906 62.902,71.972 62.902,68.289 63.246,67.945 v1(63.627,67.945)
pads on no net: JP1. JP2. JP2.SH1 JP2.SH2 JP3.S1 JP3.S2 JP5.SH1 JP5.SH2 LD1.2 LD2.2 LD3.2 LD4.2 LD5.2 LD6.2 LD7.2 LD8.2 LD9.2 LD10.2 LD11.2 LD12.2 LD13.2 LD14.2 LD15.2 LD16.2 LD17.2 LD18.2 LD19.2 LD20.2 LD21.2 LD22.2 LD23.2 LD24.2 LD25.2 LD26.2 LD27.2 LD28.2 LD29.2 LD30.2 LD31.2 LD32.2 LD33.2 LD34.2 LD35.2 LD36.2 LD37.2 LD38.2 LD39.2 LD40.2 LD41.2 LD42.2 LD43.2 LD44.2 LD45.2 LD46.2 LD47.2 LD48.2 TVS1.2 TVS2.2 U1.2 U1.3 U1.5 U2.2 U2.6 U2.7 U7.72 U7.73 U7.74 U7.75 U7.83 U7.84 U7.94 U7.95 U8.3 U8.4 U10.6 U10.15

## Polygon pours and split planes (outlines as drawn)
GND_AUX on Mid-Layer 2 "GND_AUX_L03_P002" (solid, pour order 2): 1.2,0 cw(c1.2,1.2) 0,1.2 0,83.8 cw(c1.2,83.8) 1.2,85 12.5,85 cw(c12.5,84.2) 13.3,84.2 ccw(c14.1,84.2) 14.1,83.4 56.673,83.4 56.675,83.398 70.975,83.398 ccw(c70.975,84.198) 71.775,84.198 cw(c72.575,84.198) 72.575,84.998 83.798,84.998 83.8,85 cw(c83.8,83.8) 85,83.8 85,1.2 cw(c83.8,1.2) 83.8,0 75,0 cw(c75,0.6) 74.4,0.6 ccw(c73.8,0.6) 73.8,1.2 57.2,1.2 ccw(c57.2,0.6) 56.6,0.6 cw(c56,0.6) 56,0 56.007,0
GND_AUX on Bottom Layer "GND_AUX_L04_P003" (solid, pour order 3): 1.2,0 cw(c1.2,1.2) 0,1.2 0,83.8 cw(c1.2,83.8) 1.2,85 12.5,85 cw(c12.5,84.2) 13.3,84.2 ccw(c14.1,84.2) 14.1,83.4 56.673,83.4 56.675,83.398 70.975,83.398 ccw(c70.975,84.198) 71.775,84.198 cw(c72.575,84.198) 72.575,84.998 83.798,84.998 83.8,85 cw(c83.8,83.8) 85,83.8 85,1.2 cw(c83.8,1.2) 83.8,0 75,0 cw(c75,0.6) 74.4,0.6 ccw(c73.8,0.6) 73.8,1.2 57.2,1.2 ccw(c57.2,0.6) 56.6,0.6 cw(c56,0.6) 56,0 56.007,0
GND_AUX on Mid-Layer 1 "GND_AUX_L02_P000" (solid, pour order 0): 1.2,0 cw(c1.2,1.2) 0,1.2 0,83.8 cw(c1.2,83.8) 1.2,85 12.5,85 cw(c12.5,84.2) 13.3,84.2 ccw(c14.1,84.2) 14.1,83.4 56.673,83.4 56.675,83.398 70.975,83.398 ccw(c70.975,84.198) 71.775,84.198 cw(c72.575,84.198) 72.575,84.998 83.798,84.998 83.8,85 cw(c83.8,83.8) 85,83.8 85,1.2 cw(c83.8,1.2) 83.8,0 75,0 cw(c75,0.6) 74.4,0.6 ccw(c73.8,0.6) 73.8,1.2 57.2,1.2 ccw(c57.2,0.6) 56.6,0.6 cw(c56,0.6) 56,0 56.007,0
GND_AUX on Top Layer "GND_AUX_L01_P001" (solid, pour order 1): 1.2,0 cw(c1.2,1.2) 0,1.2 0,83.8 cw(c1.2,83.8) 1.2,85 12.5,85 cw(c12.5,84.2) 13.3,84.2 ccw(c14.1,84.2) 14.1,83.4 56.673,83.4 56.675,83.398 70.975,83.398 ccw(c70.975,84.198) 71.775,84.198 cw(c72.575,84.198) 72.575,84.998 83.798,84.998 83.8,85 cw(c83.8,83.8) 85,83.8 85,1.2 cw(c83.8,1.2) 83.8,0 75,0 cw(c75,0.6) 74.4,0.6 ccw(c73.8,0.6) 73.8,1.2 57.2,1.2 ccw(c57.2,0.6) 56.6,0.6 cw(c56,0.6) 56,0 56.007,0

## Keep-outs
Keep-Out Layer:
  lines w0.254: 56,0 ccw(c56,0.6) 56.6,0.6 cw(c57.2,0.6) 57.2,1.2 73.8,1.2 cw(c73.8,0.6) 74.4,0.6 ccw(c75,0.6) 75,0 ; 56.007,0 1.2,0 cw(c1.2,1.2) 0,1.2 0,83.8 cw(c1.2,83.8) 1.2,85 12.5,85 cw(c12.5,84.2) 13.3,84.2 ccw(c14.1,84.2) 14.1,83.4 56.673,83.4 ; 56.675,83.398 70.975,83.398 ccw(c70.975,84.198) 71.775,84.198 cw(c72.575,84.198) 72.575,84.998 83.798,84.998 ; 74.979,0 83.8,0 ccw(c83.8,1.2) 85,1.2 85,83.8 ccw(c83.8,83.8) 83.8,85

## Other copper
Top Layer:
  rectangle net SHIELD: 80,80 84.575,84.6
  rectangle net SHIELD: 0.428,80 5,84.576
  rectangle net SHIELD: 0.394,0.44 5,5
  rectangle net SHIELD: 80,0.435 84.588,5
Mid-Layer 1:
  rectangle net SHIELD: 80,0.435 84.588,5
  rectangle net SHIELD: 80,80 84.575,84.6
  rectangle net SHIELD: 0.428,80 5,84.576
  rectangle net SHIELD: 0.394,0.44 5,5
Mid-Layer 2:
  rectangle net SHIELD: 80,0.435 84.588,5
  rectangle net SHIELD: 80,80 84.575,84.6
  rectangle net SHIELD: 0.428,80 5,84.576
  rectangle net SHIELD: 0.394,0.44 5,5
  rectangle net +12_AUX: 10.033,79.756 11.811,81.407
  rectangle net +12_AUX: 28.702,1.491 30.734,3.556
  region net +12_AUX: 30.734,4.064 11.43,4.064 11.43,81.407 10.414,81.407 10.414,3.048 30.734,3.048
Bottom Layer:
  region: 69.33,66.092 68.06,66.092 68.06,65.711 69.33,65.711
  rectangle: 68.06,66.929 69.33,67.31
  region: 66.052,66.092 64.782,66.092 64.782,65.711 66.052,65.711
  rectangle: 64.782,66.929 66.052,67.31
  region: 56.388,66.092 55.118,66.092 55.118,65.711 56.388,65.711
  rectangle: 55.118,66.929 56.388,67.31
  region: 53.085,66.092 51.942,66.092 51.942,65.711 53.085,65.711
  rectangle: 51.943,66.929 53.086,67.31
  rectangle net SHIELD: 0.394,0.44 5,5
  rectangle net SHIELD: 0.428,80 5,84.576
  rectangle net SHIELD: 80,80 84.575,84.6
  rectangle net SHIELD: 80,0.435 84.588,5
  rectangle net +12_AUX: 10.179,79.502 12.679,81.407
  rectangle net GND_AUX: 27.295,6.435 30.642,9.652
  rectangle net +12_AUX: 27.298,1.447 30.632,4.917
  rectangle net +12: 21.082,78.359 26.543,79.502
  region net +5: 48.305,79.883 35.892,79.883 35.892,77.089 39.198,77.089 39.198,78.613 48.305,78.613

## Silkscreen, mask and mechanical layers (free items; w line width, h text height)
Top Overlay:
  drawing of 54 lines, arcs and shapes, not listed
  text "LASERDIODE V1.0.0" at 79.267,49.53 h1.6 r270
  text "PROJECT BEE-PC1" at 81.08,49.186 h1.6 r270
Bottom Overlay:
  text "12V" at 24.511,80.399 h1
  text "5V" at 48.387,80.402 h1
  text "STATUS" at 30.353,64.273 h1
  text "VBUS" at 9.166,23.124 h1
  text "LASER EXT" at 77.453,21.209 h1.5 r90
  text "CONSOLE" at 44.704,2.679 h1